# Altium PCB AIR_QUALITY.PcbDoc
Units mil, origin at the board's own origin, x right, y up, seen from the top; angles counter-clockwise.
Board outline 1551.71 x 1510 mil, 2 copper layers (Top Layer, Bottom Layer); 62 components, 42 nets, 283 pads, 52 vias.
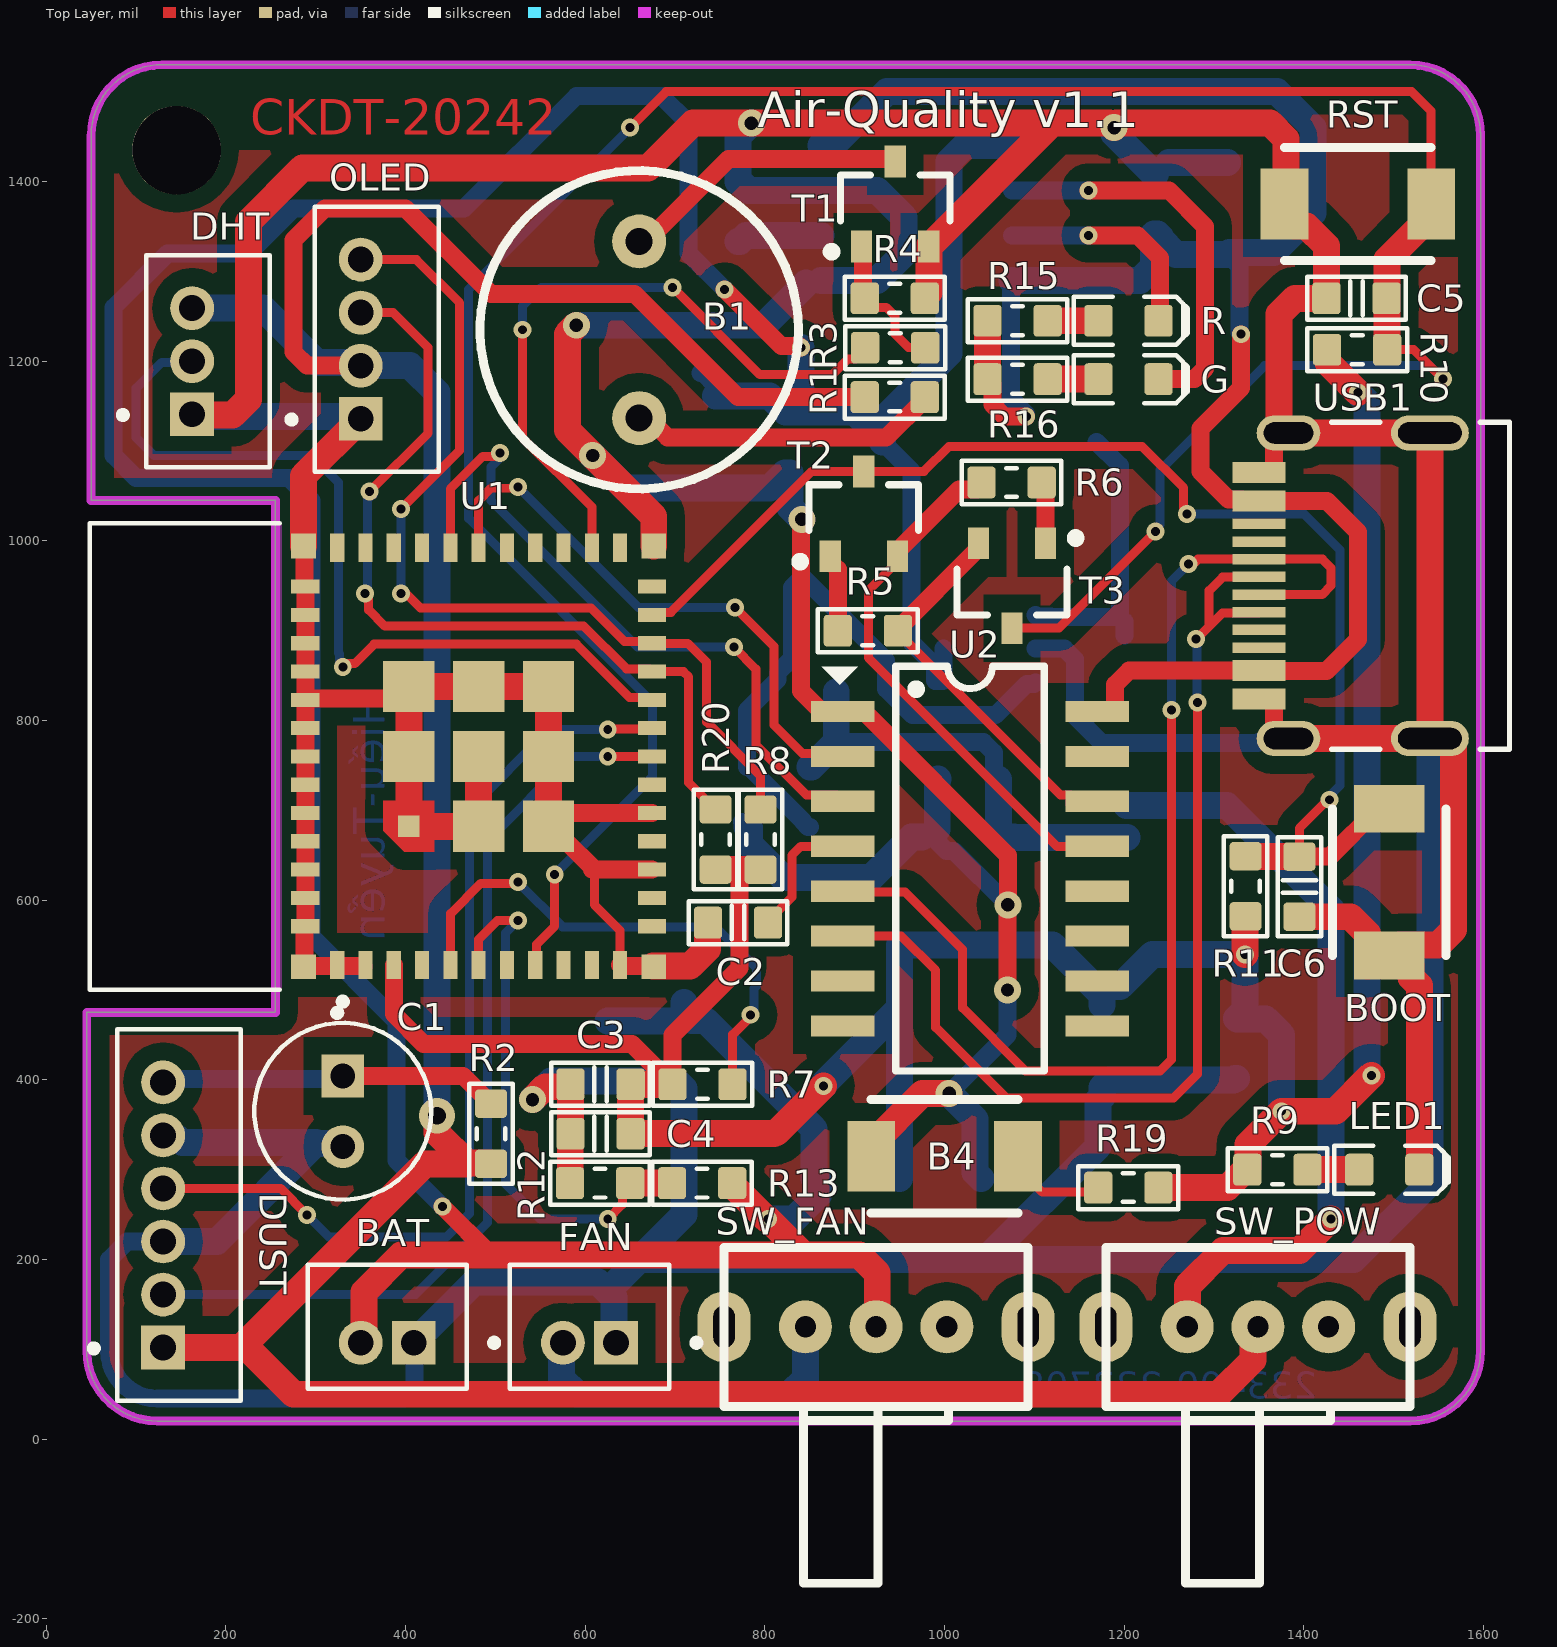
[diagram p0: Top Layer view]
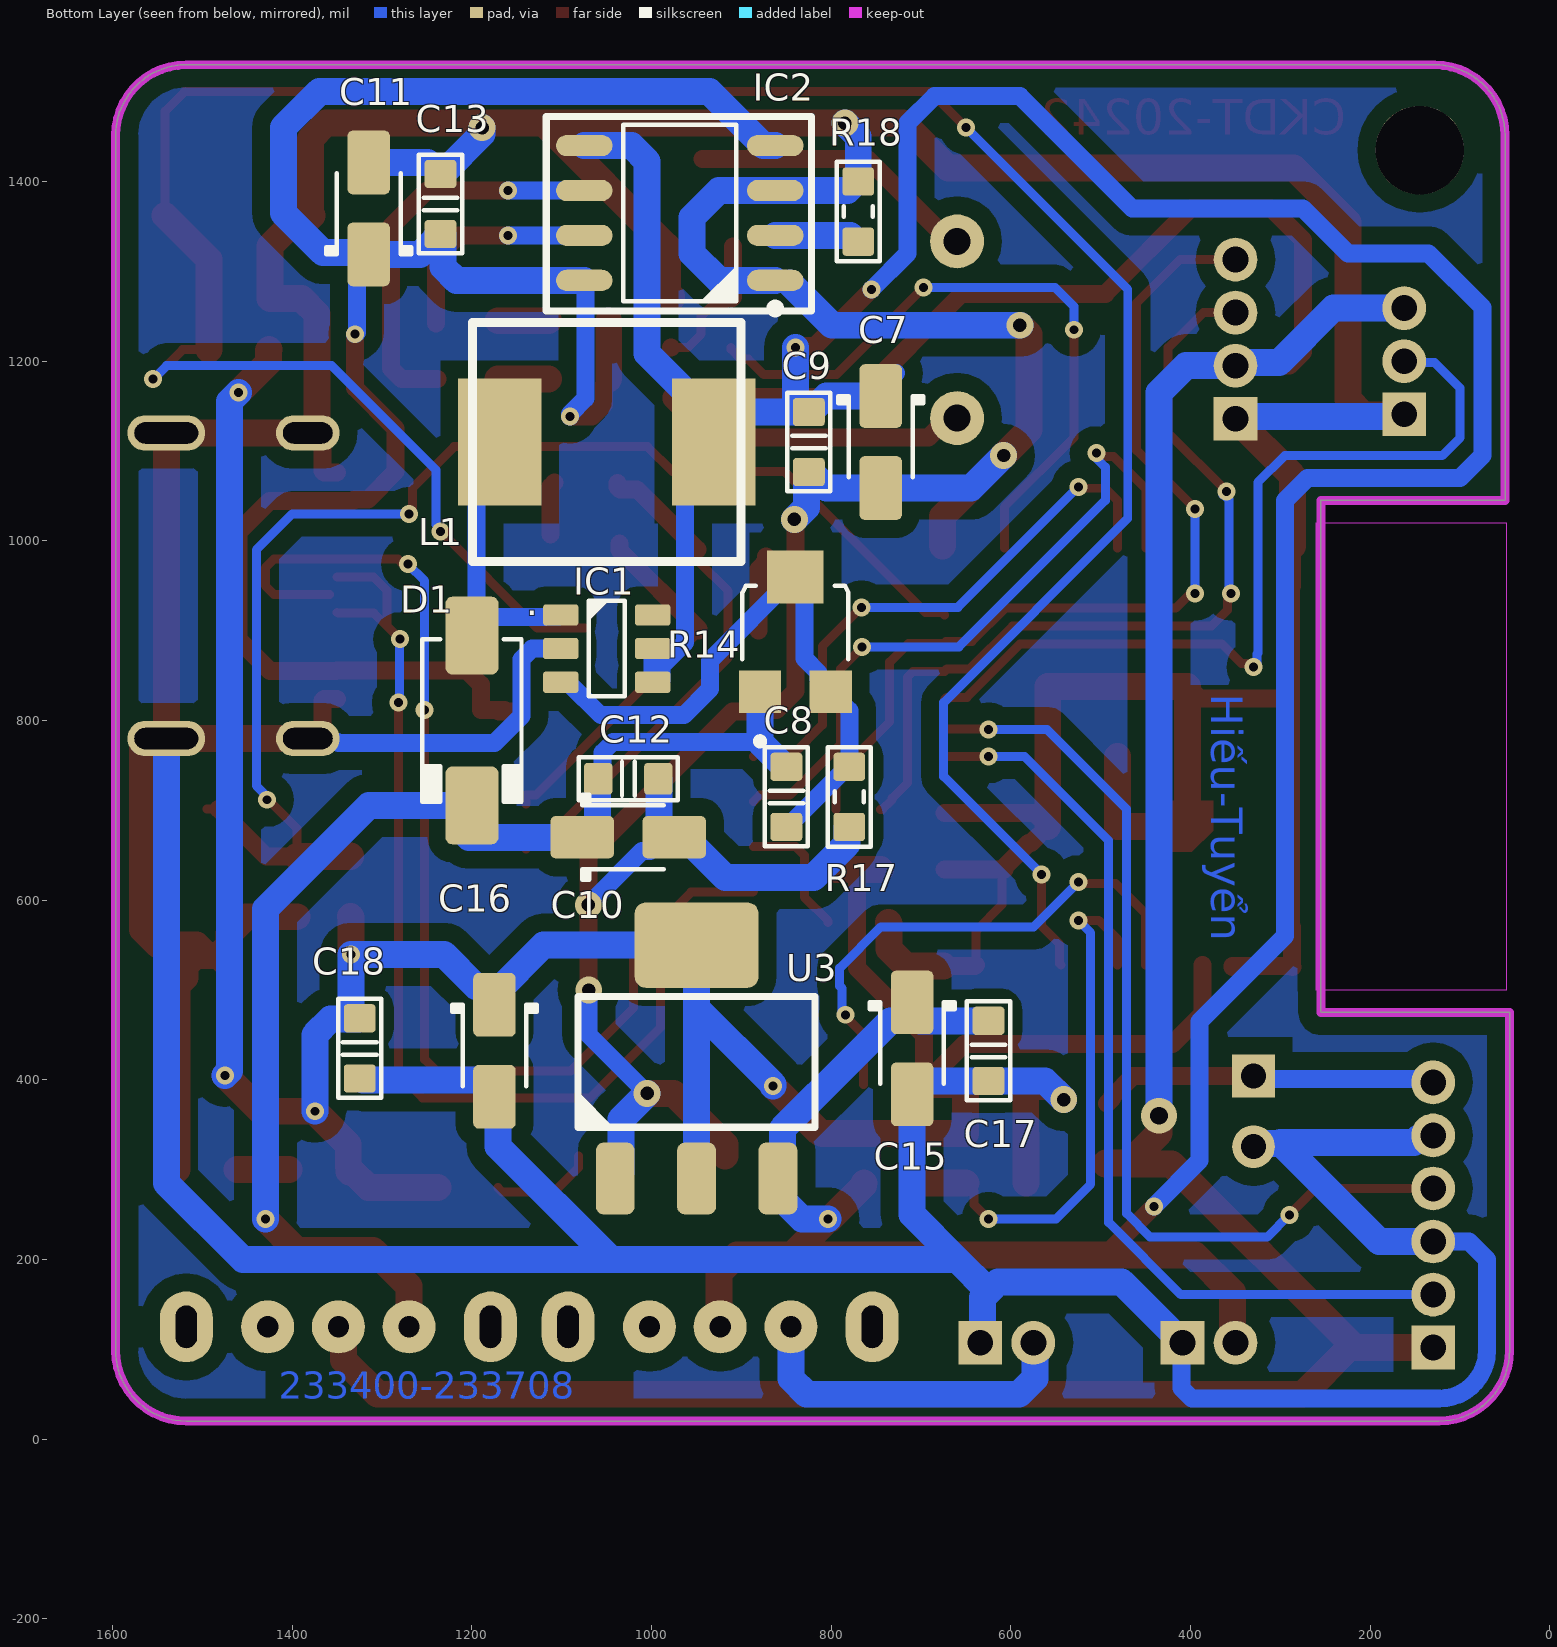
[diagram p1: Bottom Layer view, seen from below]
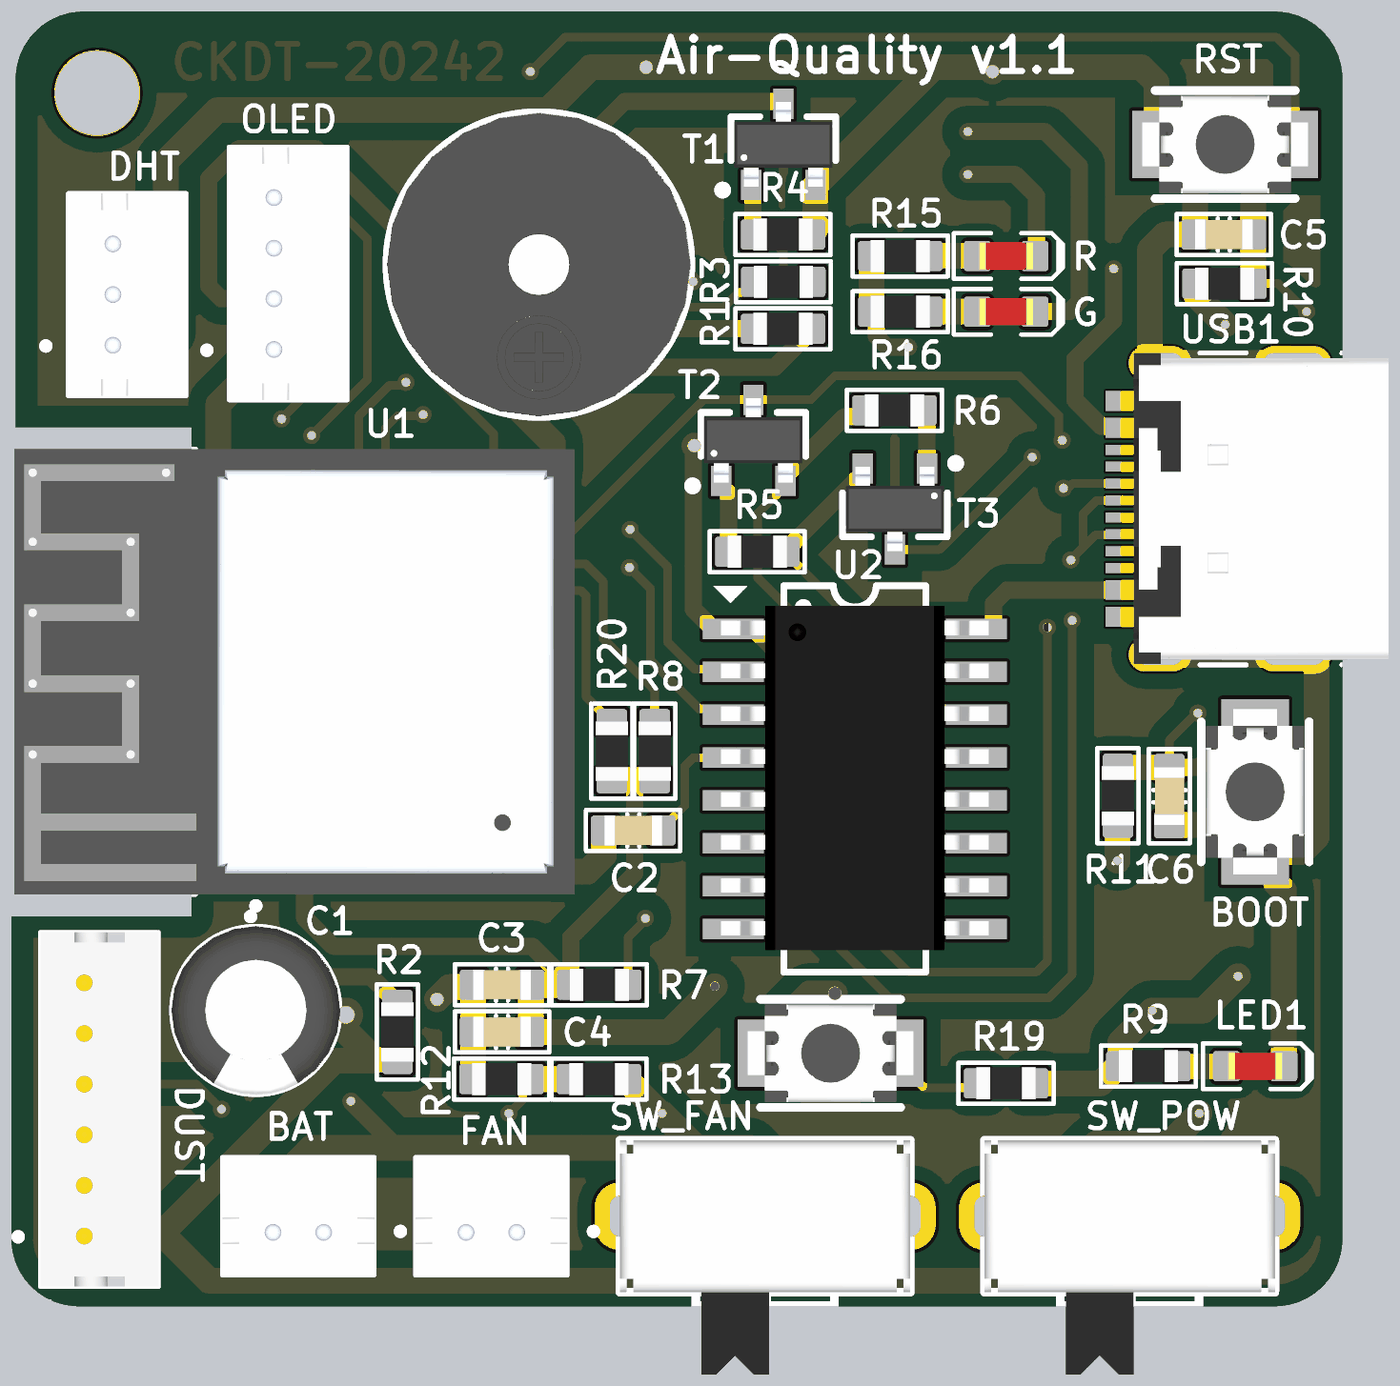
[diagram p2: 3D render of the assembled board from above, using the file's embedded part models]
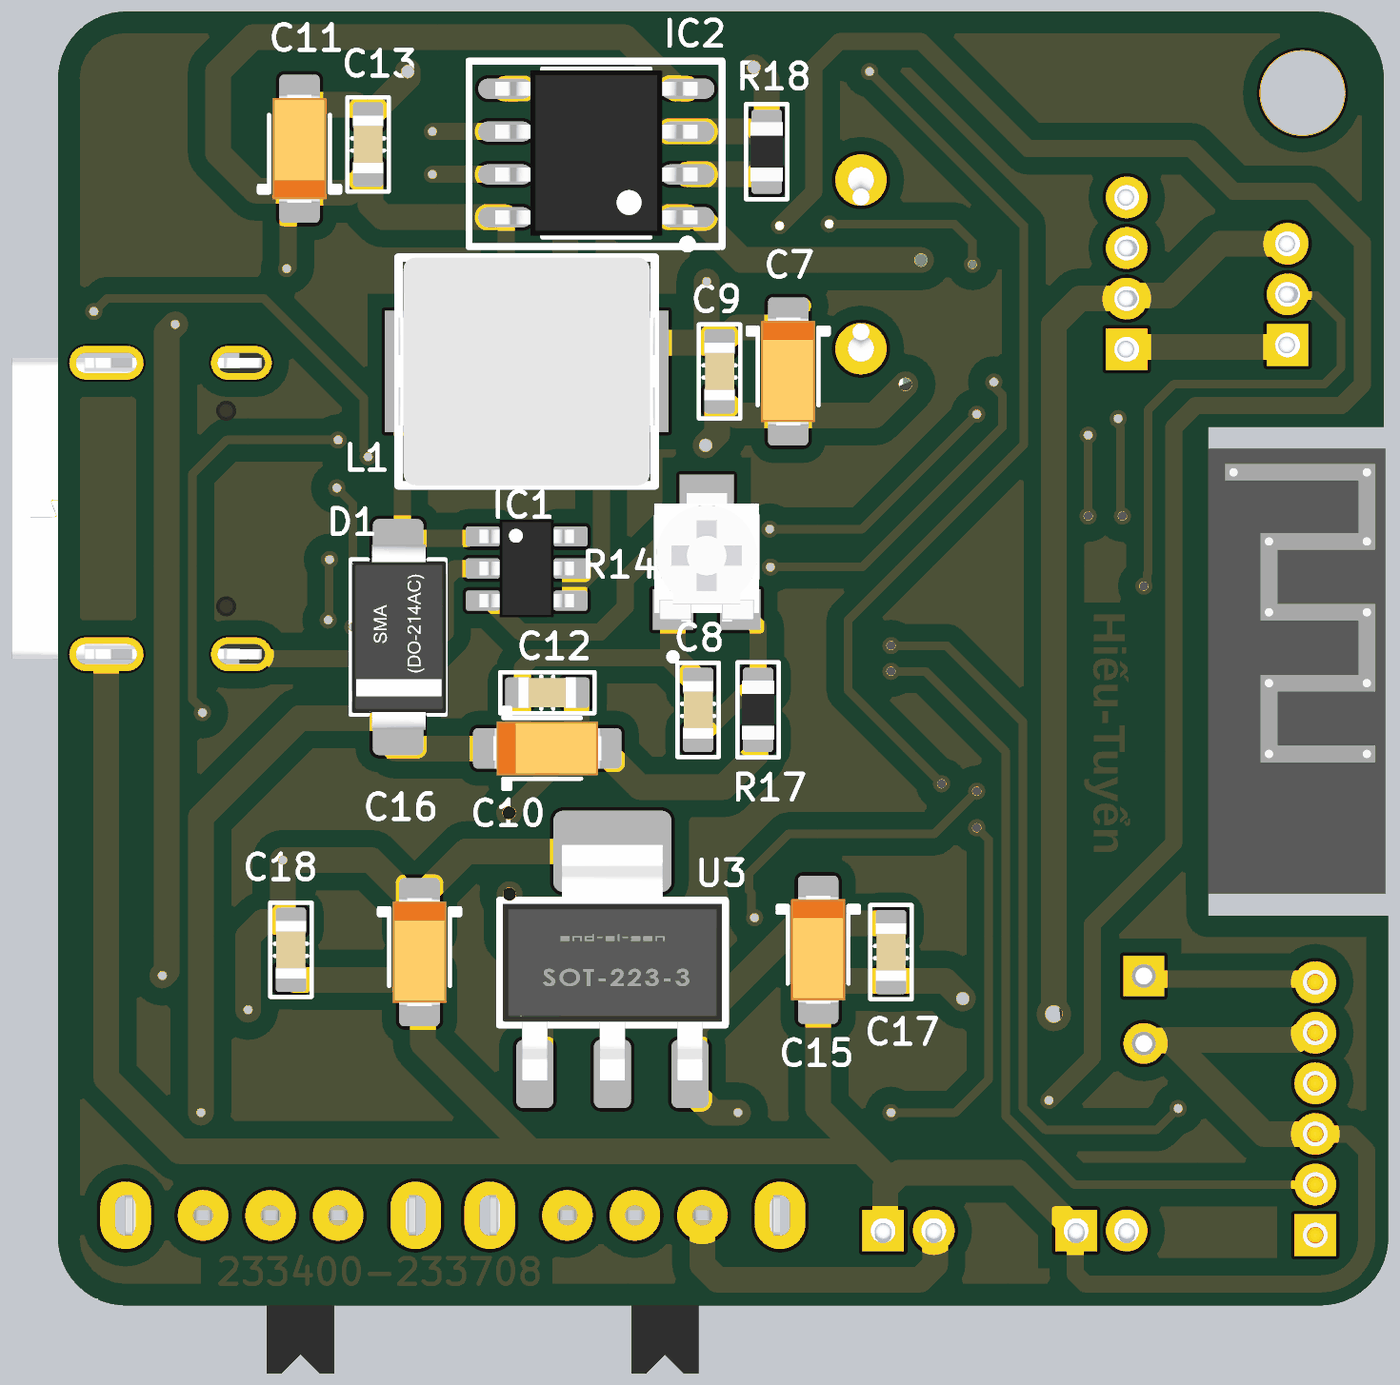
[diagram p3: 3D render of the assembled board from below, using the file's embedded part models]

## Layer stack, top to bottom
Top Solder: solder mask 0.4, Solder Resist, Dk 3.5
Top Layer: signal copper 1.4
Dielectric 1: dielectric 12.6, FR-4, Dk 4.8
Bottom Layer: signal copper 1.4
Bottom Solder: solder mask 0.4, Solder Resist, Dk 3.5

## Board outline
45,98.74 45,475 255,475 255,1045 50,1045 50,1451.26 cw(c128.74,1451.26) 128.74,1530 1517.97,1530 cw(c1517.97,1451.26) 1596.71,1451.26 1596.71,98.74 cw(c1517.97,98.74) 1517.97,20 123.74,20 cw(c123.74,98.74)

## Design rules (kind name [scope] priority, off if disabled: settings)
Clearance [All] p1: gap=20 ignorepadtopadclearanceinfootprint=FALSE except(0: Arc-Hole Track-Hole SMDPad-Hole THPad-Hole Via-Hole Fill-Hole Poly-Hole Region-Hole Text-Hole; 5: Arc-SMDPad Arc-THPad Track-SMDPad Track-THPad SMDPad-SMDPad SMDPad-THPad THPad-THPad; 10: Arc-Arc Arc-Track Arc-Via Arc-Text Track-Track Track-Via Track-Text SMDPad-Via SMDPad-Text THPad-Via THPad-Text Via-Via Via-Text Fill-Text Poly-Text Region-Text Text-Text)
HoleSize [All] p1: absolutevalues=TRUE maxlimit=393.7 minlimit=1 maxpercent=80.000 minpercent=20.000
MinimumSolderMaskSliver [All] p1: minsoldermaskwidth=5
PolygonConnect [All] p1: connectstyle=Relief reliefconductorwidth=10 reliefentries=4 polygonreliefangle="90 Angle" airgapwidth=10
RoutingVias [All] p1: holewidth=20 width=40 viastyle="Through Hole" minholewidth=10 minwidth=20 maxholewidth=15 maxwidth=30
SilkToSilkClearance [All] p1: silktosilkclearance=0
SolderMaskExpansion [All] p1: expansion=4 istentingtop=FALSE
Width [All] p1: maxlimit=30 minlimit=10 preferedwidth=20
27 further rules are at their usual default settings.

## Classes and differential pairs
component class MCU.SchDoc: BOOT C2 C3 C4 C5 C6 LED1 R5 R6 R7 R8 R9 R10 R11 R20 RST T2 T3 U2 USB1
component class Designator: BAT C7 C8 C9 C10 C11 C12 C13 C15 C16 C17 C18 D1 G IC1 IC2 L1 R R12 R13 R14 R15 R16 R17 R18 SW_POW U3

## Components (designator, comment, footprint, x,y, rotation, side; value= is the part's Value field where it differs from the comment)
B1 "Buzzer" Buzzer 660,1235 r180 top
B4 "BUTTON" "BUTTON 3x4x2" 1000,315 r0 top
BAT "Header_2P" 2P_1.5_V 379.53,125 r0 top
BOOT "BUTTON" "BUTTON 3x4x2" 1495,620 r90 top
C1 "10uF" "CAP 5x11" 330,365 r270 top value=100uF
C2 "104" "CAP 0603" 770,575 r0 top
C3 "10uF" "CAP 0603" 617,395 r180 top
C4 "0.1uF" "CAP 0603" 617,340 r180 top
C5 "0.1uF" "CAP 0603" 1458.46,1270 r0 top
C6 "0.1uF" "CAP 0603" 1395,615 r90 top
C7 "10u" "CAP_T 3216 (1208)" 745,1110 r90 bottom
C8 "104" "CAP 0603" 850,715 r270 bottom
C9 "104" "CAP 0603" 825,1110 r270 bottom
C10 "10u" "CAP_T 3216 (1208)" 1026,670.08 r0 bottom
C11 "10u" "CAP_T 3216 (1208)" 1315,1370 r270 bottom
C12 "104" "CAP 0603" 1026,735.08 r180 bottom
C13 "22u" "CAP 0603" 1235,1375 r90 bottom
C15 "10u" "CAP_T 3216 (1208)" 710,435 r90 bottom
C16 "10u" "CAP_T 3216 (1208)" 1175,432.25 r90 bottom
C17 "104" "CAP 0603" 625,432.25 r270 bottom
C18 "22u" "CAP 0603" 1325,435 r270 bottom
D1 "SS34" DO214AC-SMA 1200,800 r90 bottom
DHT "Header_3P" 3P_1.5_V 180,1200 r270 top
DUST "Header_6P" 6P_1.5_V 147.72,249.53 r270 top
FAN "Header_2P" 2P_1.5_V 604.61,125 r0 top
G "Green" "LED 0603" 1204.69,1180 r0 top
IC1 "MT3608" SOT23-6 1050,880 r180 bottom
IC2 "TP056" "SOIC 8" 968.7,1365 r0 bottom
L1 "22uH" "INDUCTOR 0630" 1050,1110 r0 bottom
LED1 "Green" "LED 0603" 1495,300 r0 top
OLED "Header_4P" 4P_1.5_V 367.72,1224.53 r270 top
R "Green" "LED 0603" 1204.69,1245 r0 top
R1 "220" "RES 0603" 945,1160 r180 top
R2 "220" "RES 0603" 495,339.54 r90 top
R3 "1K" "RES 0603" 945.46,1215 r180 top
R4 "1M" "RES 0603" 945,1270 r180 top
R5 "10K" "RES 0603" 915,900 r180 top
R6 "10K" "RES 0603" 1075,1065 r180 top
R7 "10K" "RES 0603" 730,395 r0 top
R8 "10K" "RES 0603" 795,667 r90 top
R9 "1K" "RES 0603" 1370,300 r0 top
R10 "10K" "RES 0603" 1458.78,1212.77 r0 top
R11 "10K" "RES 0603" 1335,615 r90 top
R12 "100K" "RES 0603" 616,285 r0 top
R13 "100K" "RES 0603" 729.54,285 r0 top
R14 "200K" "RES VARIABLE" 840,895 r90 bottom
R15 "4.7K" "RES 0603" 1081.69,1245 r180 top
R16 "4.7K" "RES 0603" 1081.69,1180 r180 top
R17 "12k" "RES 0603" 780,715.46 r270 bottom
R18 "1.2K" "RES 0603" 770,1366.07 r90 bottom
R19 "1K" "RES 0603" 1205,280 r180 top
R20 "10K" "RES 0603" 745,667 r90 top
RST "BUTTON" "BUTTON 3x4x2" 1460,1375 r0 top
SW_FAN "SWITCH" "Switch SK12D07" 923.74,125 r0 top
SW_POW "SWITCH" "Switch SK12D07" 1348.74,125 r0 top
T1 "C1815" C1815 945,1375 r90 top
T2 "C1815" C1815 910,1030 r90 top
T3 "C1815" C1815 1075,950 r270 top
U1 "ESP32-C3-MINI-1-N4" ESP32-C3-MINI-1-N4 375,760 r90 top
U2 "CH340C" SOP16 1030.27,638 r0 top
U3 "AMS 3V3" SOT223 950,421 r180 bottom
USB1 "USB TYPE C 3.1" "USB TYPE C 3.1" 1495,950 r90 top

## Footprints (in the part's own frame and the unit in brackets; to place one, negate y for a bottom-side part, rotate by r counter-clockwise, add the part's x,y. Pads: shape width x height; smd on the part's side, far side on the other; paste and mask are expansions set on the pad)
2P_1.5_V [mm]
  rect 1.238x1.238 / inner round 1.238 / far side rect 1.238x1.238 hole 0.73: 1(0.75,-0.45)
  round 1.238 hole 0.73: 2(-0.75,-0.45)
  silkscreen extent -2.25,-1.75 3.12,1.75, body extent -2.25,-1.78 2.25,1.72, height 4.5
3P_1.5_V [mm]
  rect 1.238x1.238 / inner round 1.238 / far side rect 1.238x1.238 hole 0.73: 1(1.5,-0.45)
  round 1.238 hole 0.73: 2(0,-0.45) 3(-1.5,-0.45)
  silkscreen extent -3,-2.51 3,1.75, body extent -3,-1.72 3,1.78, height 4.5
4P_1.5_V [mm]
  rect 1.238x1.238 / inner round 1.238 / far side rect 1.238x1.238 hole 0.73: 1(2.25,-0.45)
  round 1.238 hole 0.73: 2(0.75,-0.45) 3(-0.75,-0.45) 4(-2.25,-0.45)
  silkscreen extent -3.75,-2.51 3.75,1.75, body extent -3.75,-1.72 3.75,1.78, height 4.5
6P_1.5_V [mm]
  rect 1.238x1.238 / inner round 1.238 / far side rect 1.238x1.238 hole 0.73: 1(3.75,-0.45)
  round 1.238 hole 0.73: 2(2.25,-0.45) 3(0.75,-0.45) 4(-0.75,-0.45) 5(-2.25,-0.45) 6(-3.75,-0.45)
  silkscreen extent -5.25,-2.51 5.25,1.75, body extent -5.25,-1.75 5.25,1.75, height 4.5
"BUTTON 3x4x2" [mm]
  rect 1.35x2 smd: 1(2.075,0) 2(-2.075,0)
  silkscreen extent -2.07,-1.6 2.07,1.6, body extent -2.45,-1.45 2.45,1.45, height 2.01
Buzzer [mil] "5.5x9mm"
  round 60 hole 30: +(0,98.43) -(0,-98.43)
  silkscreen extent -177,-177 177,177, body extent -177,-177 177,177, height 217
C1815 [mm]
  rect 0.9x0.6 smd: B(-1.2,0.95) C(1.2,0) E(-1.2,-0.95)
  silkscreen extent -1.47,-1.55 0.82,1.92, body extent -1.25,-1.46 1.26,1.46, height 1.12
"CAP 5x11" [mm]
  rect 1.208x1.208 / inner round 1.208 / far side rect 1.208x1.208 hole 0.7: 1(-1,0)
  round 1.208 hole 0.7: 2(1,0)
  silkscreen extent -3.2,-2.5 2.5,2.5, body extent -2.5,-2.5 2.5,2.5, height 12.5
"CAP 0603" [mm]
  round 0.254 on Mech15: 0(0,0)
  rrect25% 0.8x0.9 smd: 1(0.85,0) 2(-0.85,0)
  silkscreen extent -1.4,-0.61 1.4,0.61, body extent -0.85,-0.45 0.85,0.45, height 0.89
"CAP_T 3216 (1208)" [mm]
  round 0.508 on Mech15: 0(0,0)
  rrect25% 1.8x1.2 smd: 1(1.3,0) 2(-1.3,0)
  silkscreen extent -1,-1.2 1.3,1.2, body extent -1.6,-0.8 1.6,0.8, height 1.8
DO214AC-SMA [mm]
  round 0.508 on Mech15: 0(0,0)
  rrect25% 2.2x1.5 smd: A(2.4,0) K(-2.4,0)
  silkscreen extent -2.3,-1.4 2.3,1.4, body extent -2.75,-1.43 2.75,1.37, height 2.6
ESP32-C3-MINI-1-N4 [mm]
  rect 0.8x0.4 smd: 1(-5.9,1.3) 2(-5.9,0.5) 3(-5.9,-0.3) 4(-5.9,-1.1) 5(-5.9,-1.9) 6(-5.9,-2.7) 7(-5.9,-3.5) 8(-5.9,-4.3) 9(-5.9,-5.1) 10(-5.9,-5.9) 11(-5.9,-6.7) 25(5.9,-6.7) 26(5.9,-5.9) 27(5.9,-5.1) 28(5.9,-4.3) 29(5.9,-3.5) 30(5.9,-2.7) 31(5.9,-1.9) 32(5.9,-1.1) 33(5.9,-0.3) 34(5.9,0.5) 35(5.9,1.3)
  rect 0.4x0.8 smd: 12(-4.8,-7.6) 13(-4,-7.6) 14(-3.2,-7.6) 15(-2.4,-7.6) 16(-1.6,-7.6) 17(-0.8,-7.6) 18(0,-7.6) 19(0.8,-7.6) 20(1.6,-7.6) 21(2.4,-7.6) 22(3.2,-7.6) 23(4,-7.6) 24(4.8,-7.6) 36(4.8,2.2) 37(4,2.2) 38(3.2,2.2) 39(2.4,2.2) 40(1.6,2.2) 41(0.8,2.2) 42(0,2.2) 43(-0.8,2.2) 44(-1.6,2.2) 45(-2.4,2.2) 46(-3.2,2.2) 47(-4,2.2) 48(-4.8,2.2)
  rect 1.45x1.45 smd: 49(-1.975,-2.7) 49(-1.975,-4.675) 49(0,-0.725) 49(0,-2.7) 49(0,-4.675) 49(1.975,-2.7) 49(1.975,-0.725) 49(1.975,-4.675)
  rect 0.6x0.6 smd paste-1 mask+0: 49(-1.975,-0.725)
  rect 0.7x0.7 smd: 50(5.95,2.25) 51(5.95,-7.65) 52(-5.95,-7.65) 53(-5.95,2.25)
  Top Layer region: -1.25,-1.45 -2.7,-1.45 -2.7,-0.6 -2.1,0 -1.25,0
  Keep-Out Layer region: 6.6,2.9 -6.6,2.9 -6.6,8.3 6.6,8.3
  Keep-Out Layer region: 6.6,2.9 -6.6,2.9 -6.6,8.3 6.6,8.3
  silkscreen extent -7.35,1.2 6.6,8.3, body extent -6.6,-8.3 6.6,8.3, height 2.55
"INDUCTOR 0630" [mm]
  rect 2.35x3.6 smd: 1(-3.025,0) 2(3.025,0)
  silkscreen extent -3.8,-3.37 3.8,3.38, body extent -3.8,-3.38 3.8,3.37, height 3.2
"LED 0603" [mm]
  round 0.254 on Mech15: 0(0,0)
  rrect25% 0.8x0.9 smd: A(-0.85,0) K(0.85,0)
  Top Layer pour cut-out: -0.5,0.5 0.5,0.5 0.5,-0.5 -0.5,-0.5
  silkscreen extent -1.55,-0.67 1.68,0.67, body extent -0.8,-0.4 0.8,0.4, height 0.75
"RES 0603" [mm]
  round 0.254 on Mech15: 0(0.012,0)
  rrect25% 0.8x0.9 smd: 1(0.862,0) 2(-0.838,0)
  silkscreen extent -1.4,-0.61 1.42,0.61, body extent -0.86,-0.47 0.89,0.48, height 0.54
"RES VARIABLE" [mm] "3X3"
  rect 1.2x1.2 smd: 1(-1.6,1) 3(-1.6,-1)
  rect 1.5x1.6 smd: 2(1.65,0)
  silkscreen extent -3.1,-1.5 1.4,1.5, body extent -1.95,-1.55 1.85,1.55, height 1.62
"SOIC 8" [mm] "8-Pin Small Outline Integrated Circuit 1.27 mm Pitch, IPC Medium Density"
  round 1 on Mech15: 0(0,0)
  oval 1.6x0.6 smd: 1(-2.7,1.905) 2(-2.7,0.635) 3(-2.7,-0.635) 4(-2.7,-1.905) 5(2.7,-1.905) 6(2.7,-0.635) 7(2.7,0.635) 8(2.7,1.905)
  silkscreen extent -3.72,-2.72 3.78,2.82, body extent -3,-2.45 3,2.45, height 1.75
SOP16 [mm]
  rect 1.8x0.6 smd: 1(-3.651,4.369) 2(-3.651,3.099) 3(-3.651,1.829) 4(-3.651,0.559) 5(-3.651,-0.711) 6(-3.651,-1.981) 7(-3.651,-3.251) 8(-3.651,-4.521) 9(3.549,-4.521) 10(3.549,-3.251) 11(3.549,-1.981) 12(3.549,-0.711) 13(3.549,0.559) 14(3.549,1.829) 15(3.549,3.099) 16(3.549,4.369)
  silkscreen extent -4.24,-5.8 2.05,5.65, body extent -4.01,-5.15 3.91,5.05, height 2.01
SOT23-6 [mm]
  round 0.5 on Mech15: 0(0,0)
  rrect25% 1x0.6 smd: 1(-1.3,0.95) 2(-1.3,0) 3(-1.3,-0.95) 4(1.3,-0.95) 5(1.3,0) 6(1.3,0.95)
  silkscreen extent -0.51,-1.35 0.51,1.35, body extent -1.4,-1.45 1.4,1.45, height 1.44
SOT223 [mm]
  round 1 on Mech15: 0(0,-0.025)
  rrect40% 1.1x2.032 smd: 1(-2.3,-3.325) 2(0,-3.325) 3(2.3,-3.325)
  rrect25% 3.5x2.413 smd: 4(0,3.275)
  silkscreen extent -3.35,-1.88 3.35,1.82, body extent -3.25,-3.53 3.25,3.47, height 1.7
"Switch SK12D07" [mm]
  round 1.5 hole 0.6: 1(-2,0) 2(0,0) 3(2,0)
  oval 1.5x2 hole 0.6 slot 1.2 at 90 deg: ""(-4.3,0) ""(4.3,0)
  silkscreen extent -4.3,-7.25 4.3,2.25, body extent -4.3,-4.69 4.3,2.25, height 4.7
"USB TYPE C 3.1" [mm] "16P"
  rect 0.59x1.5 smd mask+0.064: A1B12(-3.2,3.679) A4B9(-2.4,3.679) B1A12(3.2,3.679) B4A9(2.4,3.679)
  rect 0.298x1.5 smd mask+0.064: A5(-1.25,3.679) A6(-0.25,3.679) A7(0.25,3.679) A8(1.25,3.679) B5(1.75,3.679) B6(0.75,3.679) B7(-0.75,3.679) B8(-1.75,3.679)
  oval 1x2.2 hole 0.6 slot 1.8 at 90 deg mask+0.064: SH1(-4.32,-1.15) SH2(4.32,-1.15)
  oval 1x1.8 hole 0.6 slot 1.4 at 90 deg mask+0.064: SH3(-4.32,2.85) SH4(4.32,2.85)
  silkscreen extent -4.62,-3.4 4.62,1.63, body extent -4.6,-3.95 4.6,4, height 3.2

## Part data
C1: library part Cap_P
C2 C3 C4 C5 C6 C8 C9 C12 C13 C17 C18: library part CAP
C7 C10 C11 C15 C16: library part CAP_T
D1: library part "DIODE S"
G LED1 R: library part "LED SM"
IC2: library part TP4056
L1: library part IDT
R1 R2 R3 R4 R5 R6 R7 R8 R9 R10 R11 R12 R13 R19 R20: library part RES
R14: library part Res_variable, "SMD"
R15 R16 R17 R18: library part "Res SMD", "Res 0805"
U1: Package=None, Availability=Unavailable, MF="{'manufacturer': u'Espressif Systems'}", MP=ESP32-C3-MINI-1-N4, Price=None
U2: library part CH340G
U3: library part AMS1117
USB1: "16P"

## Free pads (board coordinates)
  round 98.43 hole 98.43: ""(145,1435)

## Via types
v1: diameter 20, hole 10, Top Layer to Bottom Layer, tented both sides, 42 vias
v2: diameter 30, hole 15, Top Layer to Bottom Layer, tented both sides, 9 vias
v3: diameter 40, hole 20, Top Layer to Bottom Layer, tented both sides, 1 vias

## Nets (pads, with @x,y where several pads share a name; then routed paths per layer and width w, separated by ;. In a path a pad name is that pad's centre, name@x,y a point inside that pad or via, vN(x,y) a via of type N, cw(c..) or ccw(c..) an arc to the next point about the centre after c; other vN are vias at no path point)
3V3: C3.2 C4.2 C16.1 C18.2 R7.2 R8.2 R9.2 R10.2 R11.2 R19.2 R20.2 U1.3 U3.2 U3.4 | length 3267.5
  Top Layer w20: U1.3 386.81,473.19 420,440 652,440 689.28,402.72 691.25,402.72 R7.2@697,396.97 ; R7.2 R7.2@697,396.97 ; 770,634 771.54,632.46 771.54,524.54 697,450 R7.2@697,396.97
  Top Layer w30: R7.2 C3.2 C4.2 810,340 811.11,341.11 812.82,341.11 v1(865,393.28) ; R20.2 770,634 R8.2 ; R19.2 1315.03,280 1332.31,297.28 1336.25,297.28 1337,298.03 R9.2 1337,301.97 1337.75,302.72 1337.75,327.76 v1(1375,365.02) 1435,365 v1(1475,405) ; v1(1334.46,539.69) 1334.46,581.46 R11.2 ; R10.2 1426.52,1212.02 1426.52,1198.48 v1(1460,1165)
  Bottom Layer w30: v1(865,393.28) 865,395 950,480 ; U3.2 950,480 ; C16.1 C16.1@1175,495.24 ; C18.2 1325.75,467.72 1357.43,467.72 1375,450.14 v1(1375,365.02) ; C18.2@1326.97,468.46 1327.72,469.21 1327.72,471.18 1334.46,477.92 v1(1334.46,539.69) 1231.26,539.69 1195.43,503.86 1183.62,503.86 C16.1@1175,495.24 ; v1(1460,1165) 1470,1155 1470,410 v1(1475,405) ; 950,480 U3.4 1120.32,549.92 C16.1@1175,495.24
5V: DHT.3 DUST.1 OLED.2 R1.1 R2.2 SW_POW.2 | length 3774.8
  Top Layer w20: OLED.2 290,1195 275,1210 275,1335 310,1370 400,1370 495,1275 654.79,1275 769.79,1160 R1.1
  Top Layer w30: DUST.1 217.43,101.89 223.11,101.89 275,50 1305,50 1343.18,88.18 1343.18,119.44 SW_POW.2 ; 216.89,101.89 421.54,306.54 468.68,306.54 ; v3(435,360) 435,340.96 468.68,307.28 494.25,307.28 R2.2
  Bottom Layer w30: DHT.3 240.94,1259.06 301.41,1198.59 OLED.2@346.41,1198.59 ; OLED.2 405,1195 435,1165 v3(435,360)
BAT: BAT.2 C7.1 C9.2 C15.1 C17.2 IC1.4 IC1.5 IC2.5 L1.1 R13.1 SW_FAN.2 U3.3 | length 4733.7
  Top Layer w20: v1(440.78,259.22) 495,205 495.78,205 ; v1(755,1280) 818.18,1216.82 838.18,1216.82 v1(840,1215)
  Top Layer w30: BAT.2 353.59,110.87 353.59,163.59 395,205 495,205 ; 495.78,205 843.46,205 ; R13.1 764.21,284.25 764.21,282.28 801.5,245 v1(803.46,245) 843.46,205 ; SW_FAN.2 925,126.26 925,185 905,205 843.46,205
  Bottom Layer w20: v1(440.78,259.22) 390,310 390,465 295,560 295,1045 270,1070 100,1070 75,1095 75,1260 135,1320 225,1320 275,1370 465,1370 590,1495 685,1495 715,1465 715,1320 v1(755,1280) ; C7.1@728.05,1186.61 731.38,1186.61 745,1172.99 C7.1 ; L1.1 963,1077.9 963,887 989.13,860.87 989.13,844.41 989.55,843.99 998.4,843.99 998.82,844.41 IC1.5
  Bottom Layer w30: C17.2 701.34,465.71 C15.1@710,474.37 ; C15.1 C15.1@710,474.37 ; C7.1 805.31,1161.18 823.03,1143.46 C9.2 C9.2@826.97,1143.46 ; v1(803.46,245) 832.72,245 859.45,271.73 U3.3 ; v1(840,1215) 840,1158.46 827.72,1146.18 827.72,1144.21 C9.2@826.97,1143.46 ; U3.3@854.58,290.08 854.58,345.42 775,425 734.25,465.75 718.62,465.75 C15.1@710,474.37 ; L1.1 L1.1@930.91,1112.2 ; IC2.5 1022.57,1440 1005,1422.43 1005,1208.7 930.91,1134.61 L1.1@930.91,1112.2 ; C9.2@826.97,1143.46 899.65,1143.46 L1.1@930.91,1112.2
BAT/2: R12.1 R13.2 U1.6 | length 607.2
  Top Layer w10: U1.6 481.3,556.3 502.43,577.43 v1(525,577.43) ; v1(625,245) 641.28,261.28 641.28,276.35 R12.1
  Top Layer w30: R12.1 R13.2
  Bottom Layer w10: v1(525,577.43) 511.21,563.64 511.21,283.79 550,245 v1(625,245)
BUTTON: B4.2 BAT.1 BOOT.2 C1.2 C2.2 C3.1 C4.1 C5.2 C6.2 C7.2 C9.1 C10.2 C11.2 C12.1 C13.1 C15.2 C16.2 C17.1 C18.1 DHT.1 DUST.3 DUST.5 FAN.1 IC1.2 IC2.1 IC2.3 LED1.K OLED.1 R4.2 R12.2 R17.1 R18.1 RST.2 T1.E U1.1 U1.2 U1.11 U1.14 U1.16 U1.36 U1.37 U1.38 U1.39 U1.40 U1.41 U1.42 U1.43 U1.44 U1.45 U1.46 U1.47 U1.48 U1.49 U1.50 U1.51 U1.52 U1.53 U2.1 U3.1 USB1.A1B12 USB1.B1A12 USB1.SH1 USB1.SH2 USB1.SH3 USB1.SH4 | length 12840.6
  Top Layer w10: U1.2@353.35,525.75 U1.2 ; 607.28,634.02 610,631.3 610,595 638.78,566.22 U1.11
  Top Layer w20: U1.53 U1.53@287.4,526.73 ; U1.50 287.4,993.27 287.4,949.96 U1.36 U1.37 U1.38 U1.39 U1.40 ; U1.1@323.82,526.73 U1.2@353.19,526.73 ; U1.2@353.35,525.75 353.35,526.57 U1.2@353.19,526.73 ; U1.49@403.54,837.76 390.28,824.49 289.88,824.49 U1.40 ; U1.11 639.76,526.73 U1.52@675.2,526.73 ; U1.14 607.28,634.02 607.28,636.89 580.47,663.7 577.6,663.7 559.06,682.24 573.82,697.01 U1.16 ; v2(841.21,1023.79) 840,1022.57 840,832.91 861.1,811.81 884.72,811.81 U2.1 910.16,810 1070.33,649.83 1070.33,594.99 1070.24,594.9 1070.24,500.24 v2(1070,500) ; USB1.A1B12 1364.86,824.02 1366.48,822.4 USB1.SH3@1366.48,788.87 ; USB1.B1A12 1364.86,1075.98 1366.48,1077.6 USB1.SH4@1366.48,1111.13 ; U1.53@287.4,526.73 U1.2@353.19,526.73 ; U1.53@287.4,526.73 287.4,570.04 U1.48 U1.47 U1.46 U1.45 U1.44 U1.43 U1.42 U1.41 U1.40
  Top Layer w30: DHT.1 163.23,1140 207.43,1140 225,1157.57 225,1355 285,1415 670,1415 720,1465 v2(785,1465) 1120.12,1465 ; U1.50 286.42,1072.36 OLED.1 ; U1.49@403.54,824.49 U1.49@403.54,837.76 ; U1.49@481.3,760 481.3,682.24 403.54,682.24 403.54,760 U1.49@403.54,837.76 ; v2(541.21,378.04) 555.46,392.28 582.79,392.28 583.54,393.03 C3.1 C4.1 583.27,339.73 583.27,285.27 R12.2 ; U1.49@559.06,682.24 U1.49@559.06,760 ; U1.49@559.06,697.01 U1.49@559.06,760 ; v2(590,1240) 580,1230 580,1123.23 v2(608.23,1095) 676.18,1027.05 U1.51 ; U1.52@675.2,526.73 716.73,526.73 735.79,545.79 735.79,574.25 C2.2 ; B4.2 918.31,327.8 975.51,385 v2(1005,385) ; R4.2 978,1271.97 982.4,1276.37 T1.E 982.87,1327.76 1120.12,1465 ; v2(1188.75,1460) 1183.75,1465 1120.12,1465 ; v2@1188.75,1462.5 1191.25,1465 1362.43,1465 1380,1447.43 1380,1363.9 1378.31,1362.2 1389.88,1350.63 1402.68,1350.63 1425,1328.31 C5.2 1390,1270 1372.43,1252.43 1372.43,1124.41 1376.75,1120.08 USB1.SH4 USB1.SH2 USB1.SH1 ; USB1.SH3 USB1.SH1 ; C6.2 1451.77,581.54 1470.63,562.68 1470.63,549.88 BOOT.2@1482.2,538.31 ; BOOT.2@1470.63,526.73 BOOT.2@1482.2,538.31 ; LED1.K 1528.46,504.84 1519.37,513.94 1519.37,526.73 1507.8,538.31 BOOT.2 ; U1.49@403.54,837.76 481.3,837.76 559.06,837.76 U1.49@559.06,760 ; BOOT.2@1482.2,538.31 BOOT.2 ; BOOT.2 1506.57,549.88 1549.14,549.88 1566.71,567.46 1566.71,774.57 1561.36,779.92 USB1.SH1
  Bottom Layer w20: DUST.3 90,220 70,200 70,98.74 ccw(c123.74,98.74) 123.74,45 398.28,45 410,56.72 410,106.34 BAT.1 ; R17.1@774.25,687.28 R17.1 ; C10.2@984.92,670.08 986.63,670.08 1001.96,654.75 1010.57,654.75 v2(1070.49,594.83) ; v2(1005,385) 1070,450 v2(1070,500) ; IC1.2 1101.27,879.91 1133.28,879.91 1145,868.19 1145,805 1175,775 1348.43,775 1349.64,776.22 1379.09,776.22 USB1.SH3
  Bottom Layer w30: DUST.3 190,220 300,330 ; DUST.5 133.59,334.52 146.84,334.52 151.36,330 300,330 ; DHT.1 164.78,1138.44 347.5,1138.44 OLED.1 ; C1.2 326.64,328.99 301.01,328.99 300,330 ; BAT.1 432.72,130.94 476.77,175 614.32,175 624.66,164.66 ; v2(541.21,378.04) 561.96,398.79 C17.1 701.38,398.79 710,390.16 C15.2 710,250 660,200 ; v2(590,1240) 799.09,1240 IC2.1@845.91,1286.81 ; v2(608.23,1095) 644.41,1058.82 C7.2 805.31,1058.82 C9.1@817.84,1071.34 ; FAN.1 631.9,109.52 631.9,157.43 624.66,164.66 ; R17.1 781.97,681.54 782.72,680.79 782.72,662.28 820,625 917.93,625 963.01,670.08 C10.2 ; v2(785,1465) 770,1450 R18.1 771.97,1400 781.97,1390 IC2.3 925,1390 934.99,1380.01 955,1360 955,1320 925,1290 IC2.1 ; C9.1@822.28,1075.79 827.72,1075.79 827.72,1037.28 v2(841.21,1023.79) ; C10.2@991.79,678.7 991.79,734.33 C12.1 ; v2(1005,385) 1033.9,356.1 1033.9,296.73 U3.1 ; v2(1188.75,1460) 1188.75,1452.75 1232.28,1409.21 1234.25,1409.21 C13.1 ; C13.1@1249.69,1421.18 C11.2 ; C18.1 1323.03,401.54 1321.5,400 1183.62,400 1175,391.38 C16.2 1170.92,376.99 1170.92,325.92 1045,200 ; USB1.SH1 1540.28,285.28 1455,200 1045,200 ; 624.66,164.66 660,200 ; 660,200 1045,200
BUZ: R3.1 U1.26 | length 744.9
  Top Layer w10: v1(530,1235) 530,1115 607.28,1037.72 U1.26 ; v1(697.14,1282.14) 794.28,1185 875,1185 892.28,1202.28 900.79,1202.28 911.54,1213.03 R3.1
  Bottom Layer w10: v1(530,1235) 530,1261.06 551.08,1282.14 v1(697.14,1282.14)
DHT: DHT.2 U1.20 | length 963.5
  Top Layer w10: v1(330,859.49) 333.83,863.31 343.31,863.31 365,885 590,885 649.13,825.87 671.34,825.87 U1.20
  Bottom Layer w10: DHT.2 161.05,1198.77 128.77,1198.77 100,1170 100,1115 120,1095 295,1095 325,1065 325,875.35 326.17,874.17 326.17,863.31 v1(330,859.49)
DTR: R6.1 T2.E U2.13 | length 559.4
  Top Layer w10: T2.E@949.21,978.66 915,944.45 915,870 1125.42,659.58 1139.57,659.58 1139.73,659.41 U2.13@1139.73,657
  Top Layer w20: T2.E@949.21,990.47 982.62,1023.88 1016.02,1057.28 1035.32,1057.28 1038.02,1059.98 R6.1@1038.02,1064.59
EN: C5.1 R10.1 RST.1 T3.C U1.8 | length 3069.3
  Top Layer w10: U1.8 545.92,529.35 545.92,550.92 565.97,570.97 v1(565.97,628.7) ; v1(650,1460) 690,1500 1520,1500 1541.69,1478.31 RST.1 RST.1@1541.69,1362.2 ; T3.C 1127.33,902.76 v1(1235,1010.43) ; R10.1 1522.23,1212.77 v1(1555,1180)
  Top Layer w30: R10.1 C5.1@1492.71,1267.26 ; C5.1@1492.68,1267.28 1492.68,1313.19 RST.1@1541.69,1362.2
  Bottom Layer w10: v1(565.97,628.7) 675,737.73 675,820 470,1025 470,1280 v1(650,1460) ; v1(1235,1010.43) 1235,1013.14 1240,1018.14 1240,1078.83 1356.17,1195 1540,1195 v1(1555,1180)
IO0: U1.12
IO1: U1.13
IO2: R7.1 U1.5 | length 592.7
  Top Layer w10: U1.5 450,527.91 450,585 483.79,618.79 523.79,618.79 v1(525,620) ; R7.1 763.93,450.21 784.14,470.43 v1(784.14,472.43)
  Bottom Layer w10: v1(525,620) 574.81,570.19 744.81,570.19 790.78,524.22 790.78,504.48 787.97,501.67 787.97,476.25 v1(784.14,472.43)
IO4: DUST.2 U1.18 | length 1041.3
  Top Layer w10: v1(625,760) U1.18
  Bottom Layer w10: DUST.2 410.94,160.94 491.21,241.21 491.21,666.21 585,760 v1(625,760)
IO5: DUST.4 U1.19 | length 1064.9
  Top Layer w10: DUST.4 260.69,279.06 v1(290,249.75) ; v1(625,790) 625.75,790.75 673.46,790.75 U1.19
  Bottom Layer w10: v1(290,249.75) 314.75,225 445,225 471.21,251.21 471.21,701.21 560,790 v1(625,790)
IO7: OLED.3 R20.1 U1.21 | length 965.6
  Top Layer w10: OLED.3 385.94,1254.06 425,1215 425,1120 v1(360,1055) ; v1(355,941.21) 358.83,937.39 358.83,923.14 376.97,905 598.28,905 645.92,857.36 671.34,857.36 U1.21 709.14,854.49 715,848.63 715,730.93 732.28,713.65 732.28,711.68 743.03,700.93 R20.1
  Bottom Layer w10: v1(355,941.21) 357.5,943.71 357.5,1045.76 362.95,1051.21 363.79,1051.21 v1(360,1055)
IO8: OLED.4 R8.1 U1.22 | length 1041.1
  Top Layer w10: OLED.4 411.89,1313.11 460,1265 460,1100.64 v1(395,1035.64) ; v1(395,941.21) 400.41,941.21 416.63,925 606.57,925 643.46,888.1 672.09,888.1 U1.22 714.02,885.98 735,865 735,798.34 795,738.34 R8.1
  Bottom Layer w10: v1(395,941.21) v1(395,1035.64)
IO9: BOOT.1 C6.1 R11.1 T2.C U1.23 | length 1451.7
  Top Layer w10: U1.23 677.09,920.35 695.35,920.35 852.24,1077.24 T2.C 977.03,1077.24 1004.78,1105 1220,1105 1266.17,1058.83 1266.17,1033.83 v1(1270,1030) ; C6.1 1395,680 1426.77,711.77 v1(1428.23,711.77) v1@1430.9,711.77 ; BOOT.1@1482.2,701.69 BOOT.1
  Top Layer w20: C6.1 1428.98,648.46 BOOT.1@1482.2,701.69
  Top Layer w30: R11.1 1335.23,648.7 1394.77,648.7 C6.1
  Bottom Layer w10: v1(1270,1030) 1400,1030 1440,990 1440,727.63 1428.23,715.86 v1(1428.23,711.77)
IO19: U1.27
NetB1_+: B1.+ R1.2 | length 346.7
  Top Layer w20: B1.+ 670.14,1136.57 691.72,1115 934.97,1115 978,1158.03 R1.2
NetB1_-: B1.- T1.C | length 321.1
  Top Layer w20: B1.- 667.92,1333.43 759.5,1425 T1.C@943.19,1425
NetB4_1: B4.1 R19.1 | length 115.5
  Top Layer w10: B4.1 1081.69,302.2 1108.9,275 1166.07,275 R19.1
NetC2_1: C2.1 U2.4 | length 146.7
  Top Layer w10: C2.1 803.46,576.97 830,603.5 830,650 840,660 U2.4
NetC8_1: C8.1 IC1.3 R14.2 R14.3 R17.2 | length 692.4
  Bottom Layer w20: C8.1 848.03,681.54 842.28,687.28 842.28,688.15 781.97,748.46 R17.2 780,811.38 814.25,845.63 814.25,853.09 830,868.84 830,947.99 841.97,959.96 935,866.93 935,835 964.13,805.87 1056.57,805.87 1091.5,840.79 1099.37,840.79 IC1.3
NetD1_A: D1.A IC1.1 L1.2 | length 323.1
  Bottom Layer w20: IC1.1 1102.99,915.59 1118.62,915.59 1119.21,915 D1.A@1195,915 ; L1.2 1195,1084.09 D1.A@1195,915 ; D1.A 1200,910 D1.A@1195,915
NetFAN_2: FAN.2 SW_FAN.1 | length 383.9
  Bottom Layer w30: FAN.2 573.47,105.68 573.47,67.57 591.05,50 827.43,50 845,67.57 SW_FAN.1
NetG_A: G.A R16.2 | length 56.5
  Top Layer w30: R16.2 G.A
NetG_K: G.K IC2.6 | length 446.6
  Top Layer w20: v1(1160,1390) 1250,1390 1290,1350 1290,1191.72 1278.28,1180 G.K
  Bottom Layer w20: IC2.6 v1(1160,1390)
NetIC2_2: IC2.2 R18.2 | length 95.3
  Bottom Layer w30: R18.2 771.97,1333.07 778.9,1340 IC2.2
NetIC2_7: IC2.7 R.K | length 248.4
  Top Layer w20: v1(1160,1340) 1215,1340 1240,1315 R.K@1240,1242
  Bottom Layer w20: IC2.7 v1(1160,1340)
NetLED1_A: LED1.A R9.1 | length 57.6
  Top Layer w30: R9.1 LED1.A
NetR3_2: R3.2 R4.1 T1.B | length 160.4
  Top Layer w10: R4.1 921.07,1260 935,1260 945,1250 945,1230 960,1215 978.39,1215 R3.2@978.43,1214.96
  Top Layer w20: T1.B@909.33,1327.76 909.33,1271.67 R4.1@911.04,1269.96 ; R3.2@978.43,1214.96 R3.2
NetR5_1: R5.1 T2.B | length 86.3
  Top Layer w20: T2.B 872.6,976.85 881.07,968.38 R5.1
NetR6_2: R6.2 T3.B | length 59.6
  Top Layer w20: R6.2 1112.4,1060.6 T3.B@1112.4,1007.24
NetR15_2: R15.2 R.A | length 56.5
  Top Layer w30: R15.2 R.A
RTS: R5.2 T3.E U2.14 | length 412.2
  Top Layer w10: R5.2 948,898.03 1129.22,716.81 1139.57,716.81 1139.73,716.65 U2.14@1139.73,707
  Top Layer w20: R5.2 948,901.97 1035.56,989.53 1035.79,989.53 T3.E@1035.79,997.24
RX: U1.30 U2.2 | length 639.5
  Top Layer w10: U1.30 481.3,1044.84 495,1058.54 523.54,1058.54 v1(525,1060) ; v1(766.41,925.98) 810,882.39 810,795 841.96,763.04 883.49,763.04 U2.2
  Bottom Layer w10: v1(525,1060) 659.02,925.98 v1(766.41,925.98)
TX: U1.31 U2.3 | length 773.5
  Top Layer w10: U1.31 449.8,1057.95 486,1094.15 501.58,1094.15 v1(505,1097.57) ; v1(765.63,881.63) 790,857.26 790,773.27 846.46,716.81 879.72,716.81 U2.3
  Bottom Layer w10: v1(505,1097.57) 505,1092.16 495,1082.16 495,1045 657.97,882.03 765.23,882.03 v1(765.63,881.63)
USB_N: U2.6 USB1.A7 USB1.B7 | length 1186.4
  Top Layer w10: U2.6 951.72,560 990,521.72 990,458.43 1068.43,380 1255,380 1281.55,406.55 v1(1281.55,819.95) ; v1(1280,890.51) 1294.55,905.06 ; USB1.B7 1349.29,919.61 1309.09,919.61 1294.55,905.06 ; USB1.A7@1350.47,959.53 1309.53,959.53 1294.55,944.55 1294.55,905.06
  Bottom Layer w10: v1(1280,890.51) 1280.78,889.74 1280.78,820.73 v1(1281.55,819.95)
USB_P: U2.5 USB1.A6 USB1.B6 | length 1311.6
  Top Layer w10: U2.5 887.64,608.89 956.11,608.89 1020,545 1020,480 1090,410 1240,410 1252.69,422.69 v1(1252.69,811.76) ; v1(1271.47,974.08) 1276.88,974.08 1282.33,979.53 USB1.B6 1420.47,979.53 1430,970 1430,950 1420.16,940.16 USB1.A6@1358.76,940.16
  Bottom Layer w10: v1(1252.69,811.76) 1252.69,955.31 v1(1271.47,974.08)
V-LED: C1.1 DUST.6 R2.1 | length 381.8
  Top Layer w20: C1.1@328.2,404.37 C1.1 464.09,404.37 487.28,381.18 487.28,379.21 R2.1@493.03,373.46
  Bottom Layer w20: DUST.6 133.6,400.77 326.4,400.77 C1.1
V_USB: C11.1 C13.2 IC2.4 IC2.8 R15.1 R16.1 U2.16 USB1.A4B9 USB1.B4A9 | length 2339.4
  Top Layer w20: R16.1 1053.17,1174.59 1053.17,1151.83 1066.4,1138.6 v1(1090.89,1138.6) ; U2.16@1155,808.19 1156.81,810 U2.16 ; U2.16@1163.73,811.56 1189.59,811.56 1189.84,811.81 1189.84,839.84 1205.51,855.51 USB1.A4B9 1350.67,855 1425,855 1460,890 1460,1010 1425.51,1044.49 USB1.B4A9 1332.24,1044.49 1330.63,1046.1 1315.94,1046.1 1285,1077.04 1285,1125 1330,1170 v1(1330,1230)
  Top Layer w30: R16.1 R15.1
  Bottom Layer w20: IC2.8 1075,1289.45 1073.88,1288.33 1073.88,1158.32 1090.89,1141.3 v1(1090.89,1138.6) ; C11.1 1328.09,1305.73 1328.09,1231.91 v1(1330,1230)
  Bottom Layer w30: IC2.4 875.71,1440 935.71,1500 1370,1500 1410,1460 1410,1365 1366.05,1321.05 1317.23,1321.05 C11.1 1257.72,1318.82 1240.14,1336.39 1240.14,1338.36 1236.97,1341.54 C13.2 1233.03,1341.54 1232.28,1340.79 1232.28,1304.86 1217.43,1290 IC2.8
VBOOT: C8.2 C10.1 C12.2 D1.K R14.1 SW_POW.1 | length 1368.1
  Top Layer w30: SW_POW.1 1270.2,125.2 1270.2,170.2 1310,210 1395,210 v1(1430,245)
  Bottom Layer w20: 879.37,775.87 1043.23,775.87 1054.95,764.15 1054.95,739.6 C12.2
  Bottom Layer w30: C8.2 851.97,748.46 879.37,775.87 R14.1 ; C12.2 1060.21,734.33 1060.21,678.7 1068.83,670.08 C10.1 1077.26,670 D1.K@1203.27,670 ; D1.K@1202.39,705.51 1314.49,705.51 1430,590 v1(1430,245)
pads on no net: C2.0 C3.0 C4.0 C5.0 C6.0 C7.0 C8.0 C9.0 C10.0 C11.0 C12.0 C13.0 C15.0 C16.0 C17.0 C18.0 D1.0 G.0 IC1.0 IC1.6 IC2.0 LED1.0 R1.0 R2.0 R3.0 R4.0 R5.0 R6.0 R7.0 R8.0 R9.0 R10.0 R11.0 R12.0 R13.0 R15.0 R16.0 R17.0 R18.0 R19.0 R20.0 R.0 SW_FAN. SW_FAN.3 SW_POW. SW_POW.3 U1.4 U1.7 U1.9 U1.10 U1.15 U1.17 U1.24 U1.25 U1.28 U1.29 U1.32 U1.33 U1.34 U1.35 U2.7 U2.8 U2.9 U2.10 U2.11 U2.12 U2.15 U3.0 USB1.A5 USB1.A8 USB1.B5 USB1.B8

## Polygon pours and split planes (outlines as drawn)
no net on Top Layer "NONET_L01_P000" (solid, pour order 0): 45,98.74 45,475 255,475 255,1045 50,1045 50,1451.26 cw(c128.74,1451.26) 128.74,1530 1517.97,1530 cw(c1517.97,1451.26) 1596.71,1451.26 1596.71,98.74 cw(c1517.97,98.74) 1517.97,20 123.74,20 cw(c123.74,98.74)
no net on Bottom Layer "NONET_L02_P001" (solid, pour order 1): 45,98.74 45,475 255,475 255,1045 50,1045 50,1451.26 cw(c128.74,1451.26) 128.74,1530 1517.97,1530 cw(c1517.97,1451.26) 1596.71,1451.26 1596.71,98.74 cw(c1517.97,98.74) 1517.97,20 123.74,20 cw(c123.74,98.74)

## Keep-outs
Keep-Out Layer:
  lines w10: 45,98.74 ccw(c123.74,98.74) 123.74,20 1517.97,20 ccw(c1517.97,98.74) 1596.71,98.74 1596.71,690.91 1596.71,1451.26 ccw(c1517.97,1451.26) 1517.97,1530 128.74,1530 ccw(c128.74,1451.26) 50,1451.26 50,1045 255,1045 255,475 45,475 45,98.74

## Other copper
Top Layer:
  text "CKDT-20242" at 227,1452 h40
Bottom Layer:
  text "Hiếu-Tuyển" at 388.65,830 h60 r90
  text "233400-233708" at 1415,45 h30

## Silkscreen, mask and mechanical layers (free items; w line width, h text height)
Top Overlay:
  text "Air-Quality v1.1" at 792,1460.33 h40